# EAGLE board finalprojbreakout (EAGLE 6.2)
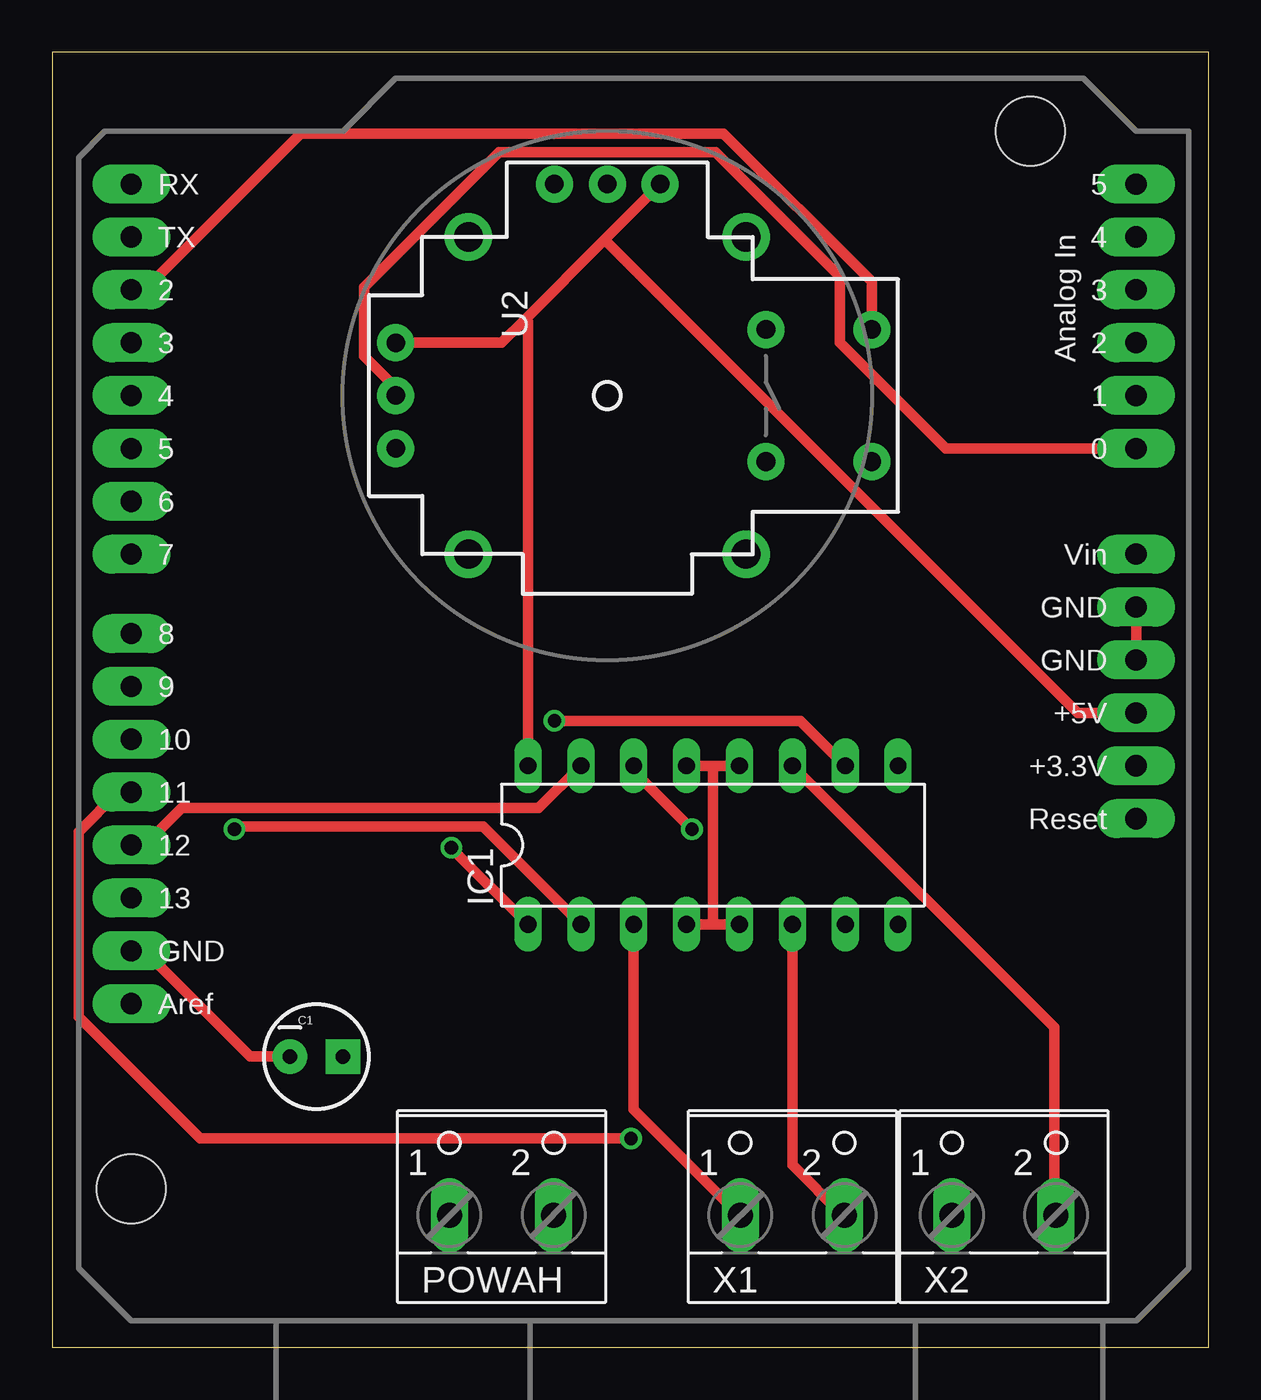
[diagram p0: board, top side]
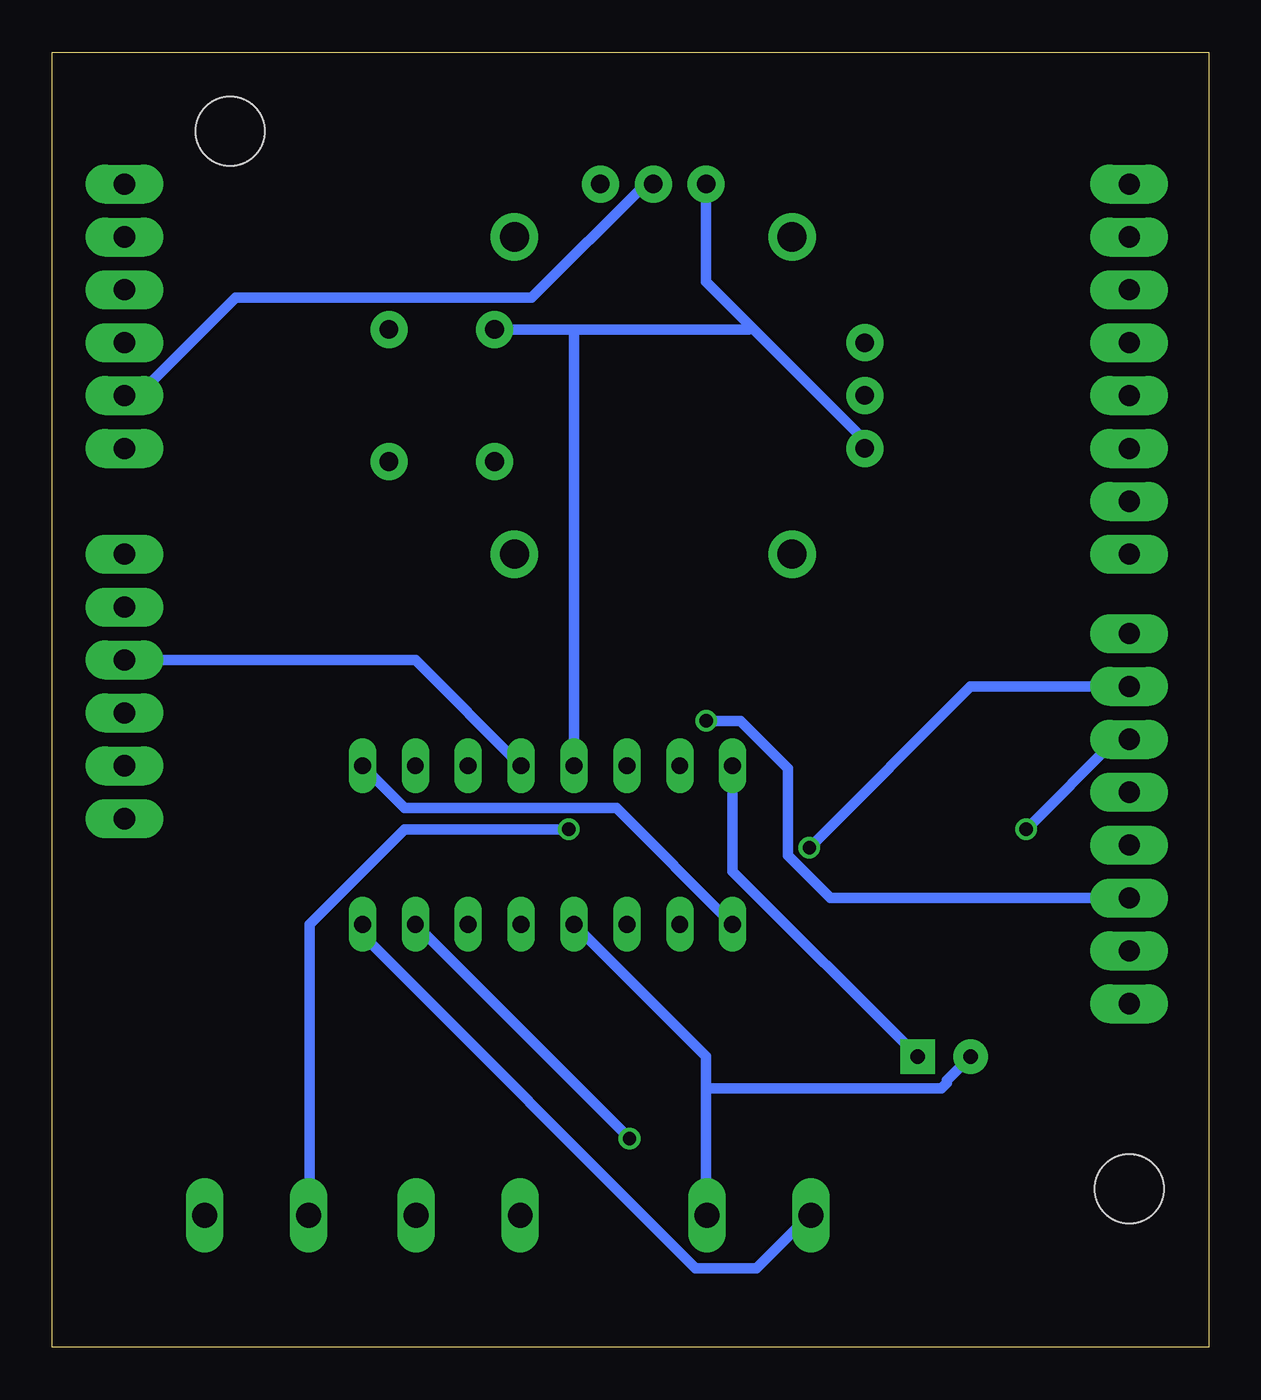
[diagram p1: board, bottom side, seen from below]

Size 55.55 x 62.22 mm. Coordinates in mm from the lower left corner, seen from the top.
Outline: 0,0 55.55,0 55.55,62.22 0,62.22 0,0
Copper layers (1*16): Top 0.035mm / dielectric 1.5mm / Bottom 0.035mm
Design rules: minimum track width 20mil, minimum drill 25mil, track to track 15mil, track to pad 15mil, pad to pad 8mil, via to via 8mil, smd to smd 8mil, copper to edge 40mil, drill to drill 8mil, minimum pad ring 10mil, minimum via ring 8mil, stop-mask expansion 4mil, vias tented up to drill 0mil, thermal gap 10mil
tKeepout: area 22.9,54.6 to 30.5,57.2; area 33,41.9 to 35.6,49.5; area 38.1,41.9 to 40.6,49.5; area 15.2,41.9 to 17.8,49.5; area 21.6,26.7 to 41.9,29.2; area 21.6,19 to 41.9,21.6; area 10.2,12.7 to 15.2,15.2; area 16.5,2.5 to 26.7,8.9; area 30.5,2.5 to 50.8,8.9

## Footprints (pad centres in the part's own frame; a part is rotated, then mirrored left to right if it is on the bottom)
CPOL-RADIAL-10UF-25V = drill 0.7 pad 1.651 square: 1 1.27,0 | drill 0.7 pad 1.651: 2 -1.27,0
DIL16 = drill 0.813 long: 1 -8.89,-3.81; 2 -6.35,-3.81; 3 -3.81,-3.81; 4 -1.27,-3.81; 5 1.27,-3.81; 6 3.81,-3.81; 7 6.35,-3.81; 8 8.89,-3.81; 9 8.89,3.81; 10 6.35,3.81; 11 3.81,3.81; 12 1.27,3.81; 13 -1.27,3.81; 14 -3.81,3.81; 15 -6.35,3.81; 16 -8.89,3.81
W237-102 = drill 1.194 long: 1 -2.5,-1.27; 2 2.5,-1.27
DUEMILANOVE_SHIELD_LONGPADS = drill 1.016 pad 1.88 long: 3.3V 50.8,26.67; 5V 50.8,29.21; A0 50.8,41.91; A1 50.8,44.45; A2 50.8,46.99; A3 50.8,49.53; A4 50.8,52.07; A5 50.8,54.61; AREF 2.54,15.24; D2 2.54,49.53; D3 2.54,46.99; D4 2.54,44.45; D5 2.54,41.91; D6 2.54,39.37; D7 2.54,36.83; D8 2.54,33.02; D9 2.54,30.48; D10 2.54,27.94; D11 2.54,25.4; D12 2.54,22.86; D13 2.54,20.32; GND@0 50.8,31.75; GND@1 50.8,34.29; GND@2 2.54,17.78; RES 50.8,24.13; RX 2.54,54.61; TX 2.54,52.07; VIN 50.8,36.83 | hole 3.302: 45.72,57.15; 2.54,6.35
JOYSTICK = drill 0.9 pad 1.778: B1A -3.175,12.7; B1B 3.175,12.7; B2A -3.175,7.62; B2B 3.175,7.62 | drill 0.889 pad 1.778: H1 -2.54,-10.16; H2 0,-10.16; H3 2.54,-10.16; V1 -10.16,2.54; V2 -10.16,0; V3 -10.16,-2.54 | drill 1.397 pad 2.286: MOUNT1 -7.62,6.668; MOUNT2 -7.62,-6.668; MOUNT3 7.62,-6.668; MOUNT4 7.62,6.668

## Placement (x,y rotation side)
C1  [CPOL-RADIAL-10UF-25V]  12.7,13.97 0 top
FRAME1  FRAME-LETTER  [CREATIVE_COMMONS]  -114.3,20.32 0 top  (outside the outline)
IC1  L293D  [DIL16]  31.75,24.13 0 top
POWAH  [W237-102]  21.59,7.62 0 top
U1  ARDUINO_SHIELDLONGPADS  [DUEMILANOVE_SHIELD_LONGPADS]  1.27,1.27 0 top
U2  JOYSTICKPTH  [JOYSTICK]  26.67,45.72 270 top
X1  [W237-102]  35.56,7.62 0 top
X2  [W237-102]  45.72,7.62 0 top

## Library data of the parts
C1 = SparkFun-Capacitors
FRAME1 = SparkFun-Aesthetics
IC1 = st-microelectronics; MPN: L293D; OC_FARNELL: 9589619; OC_NEWARK: 56P8249
POWAH X1 X2 = con-wago-500; MPN: 237-102; OC_FARNELL: unknown; OC_NEWARK: 70K9898
U1 = SparkFun-Boards
U2 = SparkFun-Electromechanical

## Nets
GND: C1.2 IC1.4 IC1.5 IC1.12 IC1.13 POWAH.2 U1.GND@0 U1.GND@1 U1.GND@2 U2.B2A U2.H3 U2.V3
N$2: IC1.8 POWAH.1
N$3: IC1.3 X1.1
N$4: IC1.6 X1.2
N$5: IC1.14 X2.1
N$6: IC1.11 X2.2
N$7: U1.A1 U2.V2
N$8: U1.A0 U2.H2
N$9: U1.D2 U2.B1A
N$10: IC1.2 U1.D10
N$11: IC1.1 IC1.9 U1.D9
N$12: IC1.7 U1.D11
N$13: IC1.15 U1.D12
N$14: IC1.10 U1.D13
VCC: C1.1 IC1.16 U1.5V U2.H1 U2.V1

## Tracks (layer width: path | path; a pad name or v marks a point on that pad's centre or on a via)
GND
  Top 0.508: C1.2 9.52,13.97 4.45,19.05 U1.GND@2 | U1.GND@1 U1.GND@0 | IC1.5 31.75,20.32 | 31.75,20.32 IC1.4 | IC1.12 31.75,27.94 | 31.75,27.94 IC1.13 | 31.75,27.94 31.75,20.32
  Bottom 0.508: U2.H3 16.51,43.56 21.97,49.02 | 21.97,49.02 24.13,51.18 U2.V3 | 30.48,48.89 22.1,48.89 21.97,49.02 | 30.48,48.89 U2.B2A | 24.13,12.45 24.13,13.97 IC1.4 | 24.13,12.45 24.13,6.35 POWAH.2 | U1.GND@0 38.1,33.02 IC1.12 | C1.2 12.57,12.83 12.57,12.7 12.83,12.45 24.13,12.45 | IC1.13 30.48,48.89
N$2
  Bottom 0.508: IC1.8 40.64,19.81 24.64,3.81 21.72,3.81 19.18,6.35 POWAH.1
N$3
  Top 0.508: IC1.3 27.94,11.43 33.02,6.35 X1.1
N$4
  Top 0.508: IC1.6 35.56,8.76 37.97,6.35 X1.2
N$5  (via drill 0.64)
  Top 0.508: IC1.14 27.94,27.69 v30.73,24.89
  Bottom 0.508: v30.73,24.89 38.61,24.89 43.18,20.32 43.18,6.35 X2.1
N$6
  Top 0.508: IC1.11 48.13,15.37 48.13,6.35 X2.2
N$7
  Bottom 0.508: U2.V2 27.05,55.88 32.51,50.42 46.74,50.42 51.44,45.72 U1.A1
N$8
  Top 0.508: U2.H2 16.51,46.1 14.99,47.62 14.99,50.93 21.46,57.4 31.88,57.4 37.85,51.44 37.85,48.26 42.93,43.18 U1.A0
N$9
  Top 0.508: U2.B1A 39.37,51.18 32.26,58.29 11.94,58.29 4.45,50.8 U1.D2
N$10  (via drill 0.64)
  Top 0.508: IC1.2 20.7,25.02 8.89,25.02 v8.76,24.89
  Bottom 0.508: v8.76,24.89 4.45,29.21 U1.D10
N$11  (via drill 0.64)
  Top 0.508: IC1.1 v19.18,24
  Bottom 0.508: IC1.1 28.45,25.91 38.61,25.91 IC1.9 | U1.D9 11.43,31.75 v19.18,24
N$12  (via drill 0.64)
  Top 0.508: v27.81,10.03 7.11,10.03 1.27,15.88 1.27,24.77 3.17,26.67 U1.D11
  Bottom 0.508: v27.81,10.03 IC1.7
N$13
  Top 0.508: IC1.15 23.37,25.91 6.22,25.91 4.45,24.13 U1.D12
N$14  (via drill 0.64)
  Top 0.508: IC1.10 35.94,30.1 v24.13,30.1
  Bottom 0.508: v24.13,30.1 22.48,30.1 20.19,27.81 20.19,23.62 18.16,21.59 U1.D13
VCC
  Top 0.508: U2.H1 21.59,48.26 22.73,49.4 | U2.V1 26.54,53.21 | 26.54,53.21 22.73,49.4 | U1.5V 49.28,30.48 26.54,53.21 | IC1.16 22.86,49.28 22.73,49.4
  Bottom 0.508: IC1.16 22.86,22.86 C1.1